# EAGLE board PROIECTUL TUL_FIN (EAGLE 9.7.0)
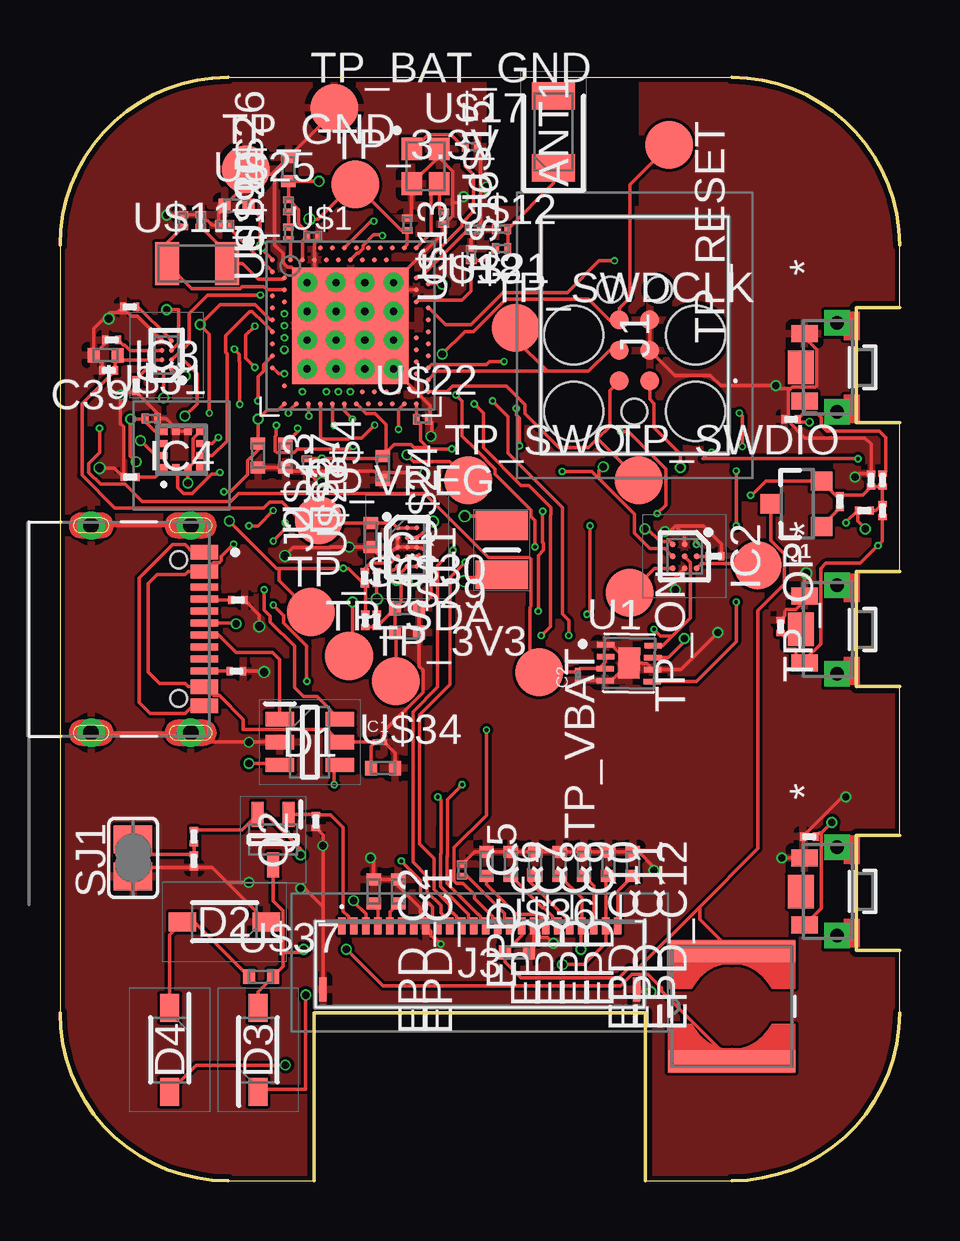
[diagram p0: board, top side]
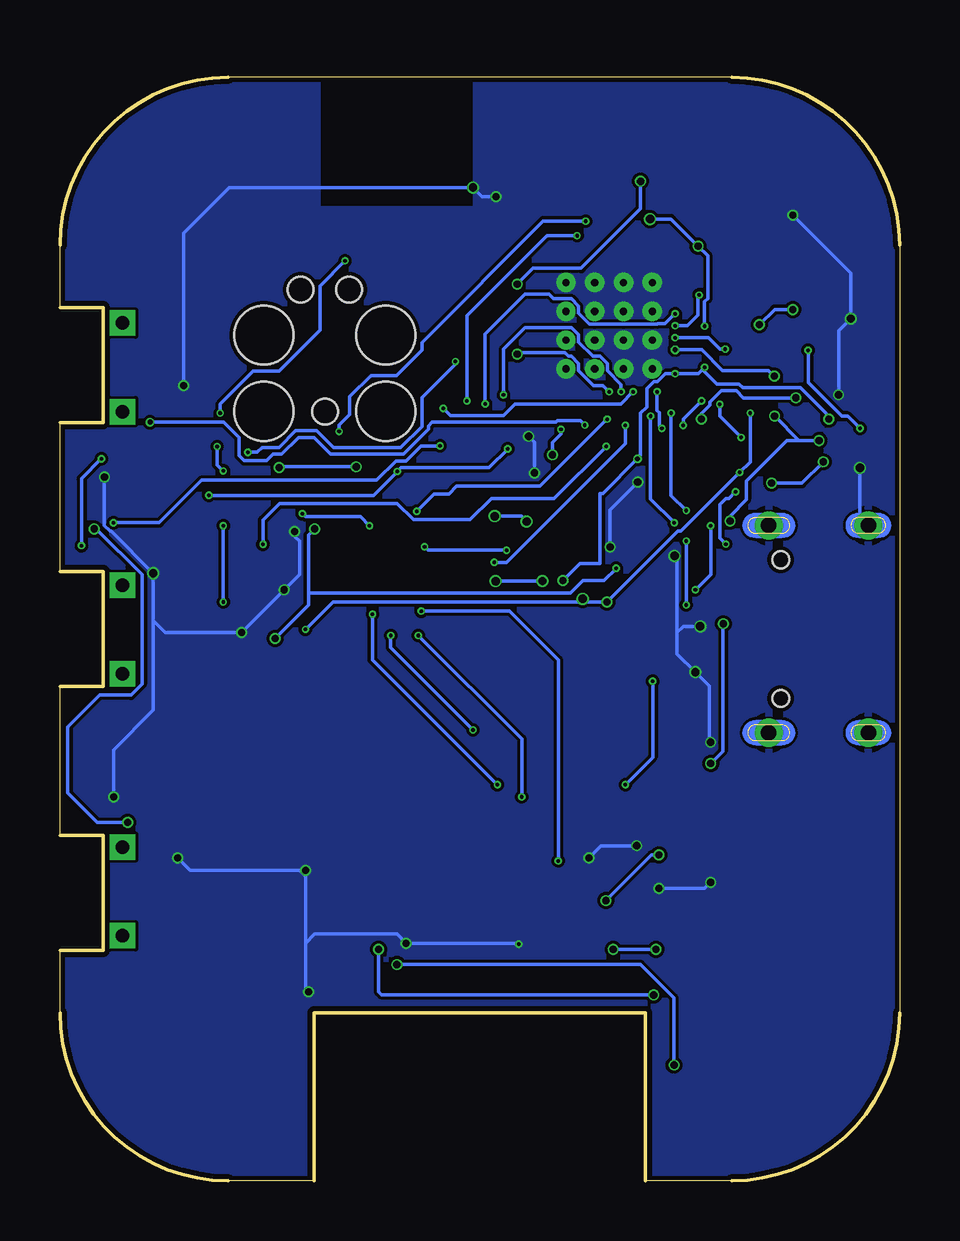
[diagram p1: board, bottom side, seen from below]

Size 35 x 46 mm. Coordinates in mm from the lower left corner, seen from the top.
Outline: 7,0 10.6,0 10.6,7 24.4,7 24.4,0 28,0 arc90 35,7 35,9.6 33.2,9.6 33.2,14.4 35,14.4 35,20.6 33.2,20.6 33.2,25.4 35,25.4 35,31.6 33.2,31.6 33.2,36.4 35,36.4 35,39 arc90 28,46 7,46 arc90 0,39 0,7 arc90 7,0
Copper layers ([2:(1+2*15)+16:15]): Top 0.035mm / dielectric 1.6mm / Route2 0.035mm / dielectric 0.15mm / Route15 0.035mm / dielectric 0.2mm / Bottom 0.035mm
Design rules "jlcpcb-2layers.dru *": minimum track width 0.15mm, minimum drill 0.15mm, track to track 5mil, track to pad 0.05mm, pad to pad 5mil, via to via 5mil, smd to smd 5mil, copper to edge 0.2mm, drill to drill 0.1mm, minimum pad ring 10mil, minimum via ring 3mil, stop-mask expansion 4mil, vias tented up to drill 0mil, thermal gap 10mil

## Footprints (pad centres in the part's own frame; a part is rotated, then mirrored left to right if it is on the bottom)
2450AT18B100E_ANTC3216X140N = smd 1.15 x 1.8: 1 -1.5,0; 2 1.5,0
GRM011R60J152KE01L_2_CAPC0201X13N = smd 0.22 x 0.23: 1 -0.185,0; 2 0.185,0
GRM011R60J152KE01L_1_0201 = smd 0.35 x 0.25: 1 0,0.275; 2 0,-0.275
NORDIC_NRF_3_RESC0402_L = smd 0.5 x 0.6: 1 -0.5,0; 2 0.5,0
ESP32_C6_LIBRARY_3_SOT95P280X145-6N = smd 1.2 x 0.6: 1 -1.25,0.95; 2 -1.25,0; 3 -1.25,-0.95; 4 1.25,-0.95; 5 1.25,0; 6 1.25,0.95
ESP32_C6_LIBRARY_5_SOD3716X135N = smd 1.15 x 0.8: 1 -1.75,0; 2 1.75,0
NORDIC_NRF_3_RESC0201_L = smd 0.28 x 0.43: 1 -0.255,0; 2 0.255,0
RT6160AWSC_BGA15C40P3X5_140X230X60 = smd 0.216 x 0.216: A1 -0.4,0.8; A2 0,0.8; A3 0.4,0.8; B1 -0.4,0.4; B2 0,0.4; B3 0.4,0.4; C1 -0.4,0; C2 0,0; C3 0.4,0; D1 -0.4,-0.4; D2 0,-0.4; D3 0.4,-0.4; E1 -0.4,-0.8; E2 0,-0.8; E3 0.4,-0.8
DRV2605YZFR_BGA9C50P3X3_144X144X62 = smd 0.25 x 0.25: A1 -0.5,0.5; A2 0,0.5; A3 0.5,0.5; B1 -0.5,0; B2 0,0; B3 0.5,0; C1 -0.5,-0.5; C2 0,-0.5; C3 0.5,-0.5
BQ25180YBGR_BGA8C40P2X4_100X155X50 = smd 0.2 x 0.2: A1 -0.2,0.6; A2 0.2,0.6; B1 -0.2,0.2; B2 0.2,0.2; C1 -0.2,-0.2; C2 0.2,-0.2; D1 -0.2,-0.6; D2 0.2,-0.6
BMA423_BMA423 = smd 0.3 x 0.35: 1 -0.75,-0.775; 2 -0.25,-0.775; 3 0.25,-0.775; 4 0.75,-0.775; 7 0.75,0.775; 8 0.25,0.775; 9 -0.25,0.775; 10 -0.75,0.775 | smd 0.35 x 0.3: 5 0.775,-0.25; 6 0.775,0.25; 11 -0.775,0.25; 12 -0.775,-0.25
TC2030-IDC_TC2030IDC = smd 0.783 x 0.783: 1 -0.953,-0.635; 2 -0.953,0.635; 3 0.317,-0.635; 4 0.317,0.635; 5 1.588,-0.635; 6 1.588,0.635 | hole 2.451: -2.223,-2.54; -2.223,2.54; 0.952,-2.54; 0.952,2.54 | hole 1.067: -2.223,0; 2.857,-1.016; 2.857,1.016
KH-TYPE-C-16P_KINGHELM_KH-TYPE-C-16P = smd 0.6 x 1.15: A1_B12 -3.2,4.725; A4_B9 -2.4,4.725; A9_B4 2.4,4.725; A12_B1 3.2,4.725 | smd 0.3 x 1.15: A5 -1.25,4.725; A6 -0.25,4.725; A7 0.25,4.725; A8 1.25,4.725; B5 1.75,4.725; B6 0.75,4.725; B7 -0.75,4.725; B8 -1.75,4.725 | drill 0.65 pad 1.05: SH1 -4.32,0; SH2 4.32,0; SH3 -4.32,4.15; SH4 4.32,4.15 | hole 0.7: -2.89,3.65; 2.89,3.65
503480-2400_5034802400 = smd 0.3 x 0.7: 1 -5.75,1.525; 2 -5.25,1.525; 3 -4.75,1.525; 4 -4.25,1.525; 5 -3.75,1.525; 6 -3.25,1.525; 7 -2.75,1.525; 8 -2.25,1.525; 9 -1.75,1.525; 10 -1.25,1.525; 11 -0.75,1.525; 12 -0.25,1.525; 13 0.25,1.525; 14 0.75,1.525; 15 1.25,1.525; 16 1.75,1.525; 17 2.25,1.525; 18 2.75,1.525; 19 3.25,1.525; 20 3.75,1.525; 21 4.25,1.525; 22 4.75,1.525; 23 5.25,1.525; 24 5.75,1.525 | smd 0.3 x 1: MP1 -6.54,-1.125; MP2 6.54,-1.125
MLP2016SR47MT0S1_INDC2016X100N = smd 1.2 x 2.2: 1 -1.028,0; 2 1.028,0
ESP32_C6_LIBRARY_2_IND_4828-WE-TPC_WRE = smd 0.9 x 5.3: 1 -2.286,0; 2 2.286,0
ESP32_C6_LIBRARY_4_ESP32_C6_LIBRARY_4_ESP32_C6_LIBRARY_4_ESP32_C6_LIBRARY_4_ESP32_WROVER_SPARKFUN-DISCRETESEMI_SOT23-3 = smd 0.8 x 0.9: 1 -0.95,-1; 2 0.95,-1; 3 0,1.1
ESP32_C6_LIBRARY_6_SOT65P210X110-3N = smd 1.05 x 0.5: 1 -1.05,0.65; 2 -1.05,-0.65; 3 1.05,0
ERA-1AEB3401C_0201 = smd 0.35 x 0.25: 1 0,0.275; 2 0,-0.275
CPF0201D7K68C1_0201 = smd 0.35 x 0.25: 1 0,0.275; 2 0,-0.275
ESP32_C6_LIBRARY_7_JUMPER_SJ = smd 1.168 x 1.6: 1 -0.762,0; 2 0.762,0
2025-10-22_07-23-44_LIBRARY_SW_EVP-AKE31A_PAN = smd 0.711 x 1.092: 1 -1.4,-0.972; 2 1.4,-0.972 | drill 0.559 pad 0.914 square: 3 -1.848,0.381; 4 1.848,0.381 | smd 1.397 x 1.092: 5 0,-1.124
HECTOR_WATCH_1_TP20R = smd 2 x 2: TP 0,0
ESP32_C6_LIBRARY_SON50P200X200X80-9N = smd 0.76 x 0.27: 1 -0.985,0.75; 2 -0.985,0.25; 3 -0.985,-0.25; 4 -0.985,-0.75; 5 0.985,-0.75; 6 0.985,-0.25; 7 0.985,0.25; 8 0.985,0.75 | smd 0.9 x 1.3: 9 0,0
NORDIC_NRF_4_AQFN50P700X700X85_HS-74N = smd 4.85 x 4.85: P$74 0,0 | drill 0.3 pad 0.6: P$75 -1.8,1.8; P$76 -0.6,1.8; P$77 0.6,1.8; P$78 1.8,1.8; P$79 -1.8,0.6; P$80 -0.6,0.6; P$81 0.6,0.6; P$82 1.8,0.6; P$83 -1.8,-0.6; P$84 -0.6,-0.6; P$85 0.6,-0.6; P$86 1.8,-0.6; P$87 -1.8,-1.8; P$88 -0.6,-1.8; P$89 0.6,-1.8; P$90 1.8,-1.8 | smd 0.2 x 0.2: P$A8 -1.25,3.25; P$A10 -0.75,3.25; P$A12 -0.25,3.25; P$A14 0.25,3.25; P$A16 0.75,3.25; P$A18 1.25,3.25; P$A20 1.75,3.25; P$A22 2.25,3.25; P$A23 2.75,3.25; P$AA24 3.25,-2.25; P$AB2 -2.75,-2.5; P$AC5 -2,-2.75; P$AC9 -1,-2.75; P$AC11 -0.5,-2.75; P$AC13 0,-2.75; P$AC15 0.5,-2.75; P$AC17 1,-2.75; P$AC19 1.5,-2.75; P$AC21 2,-2.75; P$AC24 3.25,-2.75; P$AD2 -2.75,-3.25; P$AD4 -2.25,-3.25; P$AD6 -1.75,-3.25; P$AD8 -1.25,-3.25; P$AD10 -0.75,-3.25; P$AD12 -0.25,-3.25; P$AD14 0.25,-3.25; P$AD16 0.75,-3.25; P$AD18 1.25,-3.25; P$AD20 1.75,-3.25; P$AD22 2.25,-3.25; P$AD23 2.75,-3.25; P$B1 -3.25,2.75; P$B3 -2.5,2.75; P$B5 -2,2.75; P$B7 -1.5,2.75; P$B9 -1,2.75; P$B11 -0.5,2.75; P$B13 0,2.75; P$B15 0.5,2.75; P$B17 1,2.75; P$B19 1.5,2.75; P$B24 3.25,2.75; P$C1 -3.25,2.25; P$D2 -2.75,2; P$D23 2.75,2; P$E24 3.25,1.75; P$F2 -2.75,1.5; P$F23 2.75,1.5; P$G1 -3.25,1.25; P$H2 -2.75,1; P$H23 2.75,1; P$J1 -3.25,0.75; P$J24 3.25,0.75; P$K2 -2.75,0.5; P$L1 -3.25,0.25; P$L24 3.25,0.25; P$M2 -2.75,0; P$N1 -3.25,-0.25; P$N24 3.25,-0.25; P$P2 -2.75,-0.5; P$P23 2.75,-0.5; P$R1 -3.25,-0.75; P$R24 3.25,-0.75; P$T2 -2.75,-1; P$T23 2.75,-1; P$U1 -3.25,-1.25; P$U24 3.25,-1.25; P$V23 2.75,-1.5; P$W1 -3.25,-1.75; P$W24 3.25,-1.75; P$Y2 -2.75,-2; P$Y23 2.75,-2
RESC0201_L = smd 0.28 x 0.43: 1 -0.255,0; 2 0.255,0
NORDIC_NRF_1_XTAL_3215_N = smd 1 x 1.8: 1 -1.25,0; 2 1.25,0
NORDIC_NRF_2_RESC0201_L = smd 0.28 x 0.43: 1 -0.255,0; 2 0.255,0
NORDIC_NRF_BT-XTAL_2016_N = smd 0.95 x 0.85: 1 -0.725,-0.575; 2 0.725,-0.575; 3 0.725,0.575; 4 -0.725,0.575

## Placement (x,y rotation side)
ANT1  2450AT18B100E_2450AT18B100E  [2450AT18B100E_ANTC3216X140N]  20.57,43.73 90 top
C1  0.1uF  [GRM011R60J152KE01L_2_CAPC0201X13N]  13.34,18.29 0 top
C2  0.1uF  [GRM011R60J152KE01L_2_CAPC0201X13N]  21.59,21.08 90 top
C4  1uF  [GRM011R60J152KE01L_1_0201]  3.17,33.15 180 top
C5  1uF  [GRM011R60J152KE01L_1_0201]  2.16,35.05 90 top
C6  0.1uF  [GRM011R60J152KE01L_1_0201]  2.03,33.78 90 top
C7  1uF  [GRM011R60J152KE01L_1_0201]  27.3,26.04 270 top
C8  0.1uF  [GRM011R60J152KE01L_1_0201]  33.81,29.21 0 top
C9  1uF  [GRM011R60J152KE01L_1_0201]  30.04,23.11 0 top
C10  1uF  [GRM011R60J152KE01L_1_0201]  31.24,14.35 90 top
C11  1uF  [GRM011R60J152KE01L_1_0201]  30.48,31.75 90 top
C39  10uF  [NORDIC_NRF_3_RESC0402_L]  1.91,34.42 180 top
D1  ESP32_C6_LIBRARY_3_USBLC6-2SC6Y  [ESP32_C6_LIBRARY_3_SOT95P280X145-6N]  10.41,18.29 0 top
D2  MBR0530  [ESP32_C6_LIBRARY_5_SOD3716X135N]  6.86,10.79 180 top
D3  MBR0530  [ESP32_C6_LIBRARY_5_SOD3716X135N]  8.26,5.46 90 top
D4  MBR0530  [ESP32_C6_LIBRARY_5_SOD3716X135N]  4.57,5.46 270 top
EPD_C1  1uF/50V  [NORDIC_NRF_3_RESC0402_L]  14.1,12.06 270 top
EPD_C2  1uF/50V  [NORDIC_NRF_3_RESC0402_L]  13.08,12.06 270 top
EPD_C5  0.1uF/50V  [NORDIC_NRF_3_RESC0201_L]  16.76,12.95 270 top
EPD_C6  1uF/50V  [NORDIC_NRF_3_RESC0402_L]  17.78,13.21 270 top
EPD_C7  1uF/50V  [NORDIC_NRF_3_RESC0402_L]  18.8,13.21 270 top
EPD_C8  1uF/50V  [NORDIC_NRF_3_RESC0402_L]  19.81,13.21 270 top
EPD_C9  1uF/50V  [NORDIC_NRF_3_RESC0402_L]  20.83,13.21 270 top
EPD_C10  1uF/50V  [NORDIC_NRF_3_RESC0402_L]  21.84,13.21 270 top
EPD_C11  1uF/50V  [NORDIC_NRF_3_RESC0402_L]  22.86,13.21 270 top
EPD_C12  1uF/50V  [NORDIC_NRF_3_RESC0402_L]  23.88,13.21 270 top
IC1  RT6160AWSC  [RT6160AWSC_BGA15C40P3X5_140X230X60]  14.48,26.42 0 top
IC2  DRV2605YZFR_DRV2605YZFR  [DRV2605YZFR_BGA9C50P3X3_144X144X62]  26.04,26.04 270 top
IC3  BQ25180YBGR_BQ25180YBGR  [BQ25180YBGR_BGA8C40P2X4_100X155X50]  4.45,34.42 180 top
IC4  BMA423_BMA423  [BMA423_BMA423]  5.08,30.48 0 top
J1  TC2030-IDC_TC2030-IDC  [TC2030-IDC_TC2030IDC]  23.96,34.3 90 top
J2  KH-TYPE-C-16P_KH-TYPE-C-16P  [KH-TYPE-C-16P_KINGHELM_KH-TYPE-C-16P]  1.3,23 270 top
J3  503480-2400_503480-2400  [503480-2400_5034802400]  17.5,9.1 0 top
L1  MLP2016SR47MT0S1_FTC252012SR47MBCA  [MLP2016SR47MT0S1_INDC2016X100N]  18.41,26.29 270 top
L2  68uH  [ESP32_C6_LIBRARY_2_IND_4828-WE-TPC_WRE]  28,7.27 90 top
Q1  20V/4.2A/52mΩ/1.4W  [ESP32_C6_LIBRARY_4_ESP32_C6_LIBRARY_4_ESP32_C6_LIBRARY_4_ESP32_C6_LIBRARY_4_ESP32_WROVER_SPARKFUN-DISCRETESEMI_SOT23-3]  30.74,28.22 90 top
Q2  SI1308EDL-T1-GE3  [ESP32_C6_LIBRARY_6_SOT65P210X110-3N]  8.89,14.22 270 top
R1  10k  [ERA-1AEB3401C_0201]  34.29,29.21 0 top
R2  10k  [CPF0201D7K68C1_0201]  33.53,27.94 90 top
R3  10k  [ERA-1AEB3401C_0201]  34.29,27.94 180 top
R4  10k  [ERA-1AEB3401C_0201]  2.9,36.43 90 top
R5  0  [CPF0201D7K68C1_0201]  12.7,25.14 0 top
R6  0  [ERA-1AEB3401C_0201]  13.21,25.15 0 top
R7  3k3  [ERA-1AEB3401C_0201]  13.21,23.37 180 top
R8  3k3  [ERA-1AEB3401C_0201]  12.73,23.37 180 top
R9  0  [ERA-1AEB3401C_0201]  2.92,29.34 270 top
R10  0.47  [ERA-1AEB3401C_0201]  5.59,14.35 180 top
R11  2.2  [ERA-1AEB3401C_0201]  5.59,13.34 180 top
R12  10k  [ERA-1AEB3401C_0201]  10.67,14.99 180 top
R13  5k1  [ERA-1AEB3401C_0201]  7.36,21.25 90 top
R14  5k1  [ERA-1AEB3401C_0201]  7.42,24.21 270 top
R_PWR_EPD  10k  [ERA-1AEB3401C_0201]  32.51,28.32 180 top
SJ1  [ESP32_C6_LIBRARY_7_JUMPER_SJ]  3.05,13.46 90 top
SW4  2025-10-22_07-23-44_LIBRARY_EVP-AKE31A  [2025-10-22_07-23-44_LIBRARY_SW_EVP-AKE31A_PAN]  32.01,33.91 270 top
SW5  2025-10-22_07-23-44_LIBRARY_EVP-AKE31A  [2025-10-22_07-23-44_LIBRARY_SW_EVP-AKE31A_PAN]  32.01,12.06 270 top
SW6  2025-10-22_07-23-44_LIBRARY_EVP-AKE31A  [2025-10-22_07-23-44_LIBRARY_SW_EVP-AKE31A_PAN]  32.01,22.99 270 top
TP_3.3V  HECTOR_WATCH_1_TPTP20R  [HECTOR_WATCH_1_TP20R]  12.32,41.53 0 top
TP_3V3  HECTOR_WATCH_1_TPTP20R  [HECTOR_WATCH_1_TP20R]  14.01,20.83 0 top
TP_BAT_GND  HECTOR_WATCH_1_TPTP20R  [HECTOR_WATCH_1_TP20R]  11.43,44.72 0 top
TP_GND  HECTOR_WATCH_1_TPTP20R  [HECTOR_WATCH_1_TP20R]  7.75,42.16 0 top
TP_ON  HECTOR_WATCH_1_TPTP20R  [HECTOR_WATCH_1_TP20R]  23.75,24.51 270 top
TP_OP  HECTOR_WATCH_1_TPTP20R  [HECTOR_WATCH_1_TP20R]  29.08,25.65 270 top
TP_RESET  HECTOR_WATCH_1_TPTP20R  [HECTOR_WATCH_1_TP20R]  25.4,43.18 270 top
TP_SCL  HECTOR_WATCH_1_TPTP20R  [HECTOR_WATCH_1_TP20R]  10.46,23.71 0 top
TP_SDA  HECTOR_WATCH_1_TPTP20R  [HECTOR_WATCH_1_TP20R]  12.05,21.88 0 top
TP_SWDCLK  HECTOR_WATCH_1_TPTP20R  [HECTOR_WATCH_1_TP20R]  18.99,35.56 0 top
TP_SWDIO  HECTOR_WATCH_1_TPTP20R  [HECTOR_WATCH_1_TP20R]  24.13,29.21 0 top
TP_SWO  HECTOR_WATCH_1_TPTP20R  [HECTOR_WATCH_1_TP20R]  17.02,29.21 0 top
TP_VBAT  HECTOR_WATCH_1_TPTP20R  [HECTOR_WATCH_1_TP20R]  19.98,21.21 270 top
TP_VREG  HECTOR_WATCH_1_TPTP20R  [HECTOR_WATCH_1_TP20R]  10.79,27.53 0 top
U1  ESP32_C6_LIBRARY_MAX17048G+T10  [ESP32_C6_LIBRARY_SON50P200X200X80-9N]  23.72,21.59 358.8 top
U$1  NORDIC_NRF_4_NRF52840_QF  [NORDIC_NRF_4_AQFN50P700X700X85_HS-74N]  12.11,35.65 0 top
U$2  100nF  [RESC0201_L]  6.87,39.84 0 top
U$4  100nF  [NORDIC_NRF_3_RESC0201_L]  10.29,29.84 270 top
U$5  12pF  [RESC0201_L]  5.12,40.02 270 top
U$6  12pF  [RESC0201_L]  5.88,40.02 270 top
U$8  47nF  [RESC0201_L]  10.54,39.37 180 top
U$10  100nF  [RESC0201_L]  14.48,39.88 270 top
U$11  [NORDIC_NRF_1_XTAL_3215_N]  5.71,38.23 0 top
U$12  [NORDIC_NRF_2_RESC0201_L]  18.41,38.86 0 top
U$13  1pF  [NORDIC_NRF_3_RESC0201_L]  17.14,38.61 90 top
U$15  32MHz  [NORDIC_NRF_BT-XTAL_2016_N]  15.24,42.29 270 top
U$16  12pF  [NORDIC_NRF_3_RESC0201_L]  16,40.13 270 top
U$17  12pF  [NORDIC_NRF_3_RESC0201_L]  17.14,43.11 0 top
U$18  100pF  [NORDIC_NRF_3_RESC0201_L]  17.27,39.66 180 top
U$19  10μH  [NORDIC_NRF_2_RESC0201_L]  9.53,39.5 90 top
U$20  15nH  [NORDIC_NRF_2_RESC0201_L]  9.53,40.64 90 top
U$21  1pF  [NORDIC_NRF_3_RESC0201_L]  18.41,39.67 180 top
U$22  100nF  [NORDIC_NRF_3_RESC0201_L]  15.11,31.75 0 top
U$23  4.7μF  [NORDIC_NRF_3_RESC0402_L]  8.26,30.23 270 top
U$24  4.7μF  [NORDIC_NRF_3_RESC0402_L]  13.46,29.72 270 top
U$25  4.7μF  [NORDIC_NRF_3_RESC0402_L]  7.37,40.64 0 top
U$26  1μF  [NORDIC_NRF_3_RESC0402_L]  9.53,42.16 90 top
U$27  4.7μF  [NORDIC_NRF_3_RESC0402_L]  9.4,30.23 270 top
U$28  10uF  [NORDIC_NRF_3_RESC0402_L]  12.95,26.92 90 top
U$29  22uF  [NORDIC_NRF_3_RESC0402_L]  14.48,22.86 0 top
U$30  22uF  [NORDIC_NRF_3_RESC0402_L]  14.48,23.88 0 top
U$31  100nF  [NORDIC_NRF_3_RESC0201_L]  3.81,31.77 0 top
U$34  4.7uF  [NORDIC_NRF_3_RESC0402_L]  13.46,17.2 0 top
U$36  10uF  [NORDIC_NRF_3_RESC0402_L]  19.05,9.53 0 top
U$37  4.7uF/25V  [NORDIC_NRF_3_RESC0402_L]  8.38,8.51 0 top

## Library data of the parts
ANT1 = InkTime_v5; ARROW_PART_NUMBER: 2450AT18B100E; ARROW_PRICE-STOCK: https://www.arrow.com/en/products/2450at18b100e/johanson-dielectrics?utm_currency=USD&region=nac; DESCRIPTION: Antennas 2.45GHz ANTENNA; HEIGHT: 1.4mm; MANUFACTURER_NAME: JOHANSON TECHNOLOGY; MANUFACTURER_PART_NUMBER: 2450AT18B100E; MOUSER_PART_NUMBER: 609-2450AT18B100E; MOUSER_PRICE-STOCK: https://www.mouser.co.uk/ProductDetail/Johanson-Technology/2450AT18B100E?qs=yCnrNFeXz%252Bh5MFsFIXGZGA%3D%3D
C1 C2 = InkTime_v5; AVAILABILITY: In Stock; CHECK_PRICES: https://www.snapeda.com/parts/GRM011R60J152KE01L/Murata/view-part/?ref=eda; DESCRIPTION: SMD Capacitor X5R(EIA) with Capacitance: 1500pF Tol. 10%. Rated Voltage: 6.3Vdc; MF: Murata; MP: GRM011R60J152KE01L; PACKAGE: 0201 Murata; PRICE: None; SNAPEDA_LINK: https://www.snapeda.com/parts/GRM011R60J152KE01L/Murata/view-part/?ref=snap
C4-C11 C39 EPD_C1 EPD_C2 EPD_C5-EPD_C12 R1-R14 R_PWR_EPD SJ1 SW4-SW6 TP_3.3V TP_3V3 TP_BAT_GND TP_GND TP_ON TP_OP TP_RESET TP_SCL TP_SDA TP_SWDCLK TP_SWDIO TP_SWO TP_VBAT TP_VREG U$1 U$4 U$11-U$13 U$15-U$31 U$34 U$36 U$37 = InkTime_v5
D1 = InkTime_v5; AVAILABILITY: In Stock; CHECK_PRICES: https://www.snapeda.com/parts/USBLC6-2SC6Y/STMicroelectronics/view-part/?ref=eda; DESCRIPTION: 17V Clamp 5A (8/20µs) Ipp Tvs Diode Surface Mount SOT-23-6; MF: STMicroelectronics; MP: USBLC6-2SC6Y; PACKAGE: SOT-23-6 STMicroelectronics; PRICE: None; SNAPEDA_LINK: https://www.snapeda.com/parts/USBLC6-2SC6Y/STMicroelectronics/view-part/?ref=snap
D2-D4 = InkTime_v5; AVAILABILITY: In Stock; CHECK_PRICES: https://www.snapeda.com/parts/MBR0530/Onsemi/view-part/?ref=eda; DESCRIPTION: Diode Schottky 30 V 500mA Surface Mount SOD-123; MF: ON Semiconductor; MP: MBR0530; PACKAGE: SOD-123-2 ON Semiconductor; PRICE: None; PURCHASE-URL: https://www.snapeda.com/api/url_track_click_mouser/?unipart_id=179458&manufacturer=ON Semiconductor&part_name=MBR0530&search_term=None; SNAPEDA_LINK: https://www.snapeda.com/parts/MBR0530/Onsemi/view-part/?ref=snap
IC1 = InkTime_v5; DESCRIPTION: Buck-Boost Regulator Positive Output Step-Up/Step-Down I2C DC-DC Controller IC 15-WL-CSP (BSC) (1.4x2.3); HEIGHT: 0.6mm; MANUFACTURER_NAME: RICHTEK; MANUFACTURER_PART_NUMBER: RT6160AWSC; MOUSER_PART_NUMBER: 835-RT6160AWSC; MOUSER_PRICE-STOCK: https://www.mouser.co.uk/ProductDetail/Richtek/RT6160AWSC?qs=amGC7iS6iy%2FLd9PSoixZXQ%3D%3D
IC2 = InkTime_v5; ARROW_PART_NUMBER: DRV2605YZFR; ARROW_PRICE-STOCK: https://www.arrow.com/en/products/drv2605yzfr/texas-instruments?region=nac; DESCRIPTION: Haptic Driver for ERM/LRA with Built-In Library and Smart Loop Architecture; HEIGHT: 0.625mm; MANUFACTURER_NAME: Texas Instruments; MANUFACTURER_PART_NUMBER: DRV2605YZFR
IC3 = InkTime_v5; ARROW_PART_NUMBER: BQ25180YBGR; ARROW_PRICE-STOCK: https://www.arrow.com/en/products/bq25180ybgr/texas-instruments?utm_currency=USD&region=nac; DESCRIPTION: Charger IC Lithium Ion/Polymer, Lithium Iron Phosphate 8-DSBGA (1.6x1.1); HEIGHT: 0.5mm; MANUFACTURER_NAME: Texas Instruments; MANUFACTURER_PART_NUMBER: BQ25180YBGR; MOUSER_PART_NUMBER: 595-BQ25180YBGR; MOUSER_PRICE-STOCK: https://www.mouser.co.uk/ProductDetail/Texas-Instruments/BQ25180YBGR?qs=doiCPypUmgEWjAK%252BJAX6Tw%3D%3D
IC4 = InkTime_v5; ARROW_PART_NUMBER: BMA423; ARROW_PRICE-STOCK: https://www.arrow.com/en/products/bma423/bosch; DESCRIPTION: Accelerometers Triaxial low-g 12bit Acceleration Sensor; HEIGHT: 1mm; MANUFACTURER_NAME: BOSCH; MANUFACTURER_PART_NUMBER: BMA423; MOUSER_PART_NUMBER: 262-BMA423; MOUSER_PRICE-STOCK: https://www.mouser.co.uk/ProductDetail/Bosch-Sensortec/BMA423?qs=HXFqYaX1Q2xC%252BSgeGoX3mg%3D%3D
J1 = InkTime_v5; DESCRIPTION: CABLE ADAPTER 6 POS; HEIGHT: 19mm; MANUFACTURER_NAME: Tag Connect; MANUFACTURER_PART_NUMBER: TC2030-IDC
J2 = InkTime_v5; AVAILABILITY: Not in stock; CHECK_PRICES: https://www.snapeda.com/parts/KH-TYPE-C-16P/Kinghelm/view-part/?ref=eda; MF: kinghelm; MP: KH-TYPE-C-16P; PACKAGE: None; PRICE: None; SNAPEDA_LINK: https://www.snapeda.com/parts/KH-TYPE-C-16P/Kinghelm/view-part/?ref=snap
J3 = InkTime_v5; DESCRIPTION: FFC & FPC Connectors 0.5mm FPC RA SMT Dual Contact 24Ckt; HEIGHT: 1.87mm; MANUFACTURER_NAME: Molex; MANUFACTURER_PART_NUMBER: 503480-2400; MOUSER_PART_NUMBER: 538-503480-2400; MOUSER_PRICE-STOCK: https://www.mouser.co.uk/ProductDetail/Molex/503480-2400?qs=OAhjpuo3Vu7efIoxFh9AOw%3D%3D
L1 = InkTime_v5; DESCRIPTION: SMD / SMT Inductors (Coils), L=0.47?H, L x W x T :; HEIGHT: 1mm; JLCPCB: https://jlcpcb.com/partdetail/6763488-FTC252012SR47MBCA/C5832368; MANUFACTURER_NAME: TDK; MANUFACTURER_PART_NUMBER: FTC252012SR47MBCA
L2 = InkTime_v5; COPYRIGHT: Copyright (C) 2024 Ultra Librarian. All rights reserved.; MANUFACTURER_PART_NUMBER: 744043680; MFR_NAME: Wurth Electronics
Q1 = InkTime_v5; PROD_ID: TRAN-14388
Q2 = InkTime_v5; AVAILABILITY: In Stock; CHECK_PRICES: https://www.snapeda.com/parts/SI1308EDL-T1-GE3/Vishay+Siliconix/view-part/?ref=eda; DESCRIPTION: Si1308EDL-T1-GE3 N-channel MOSFET Transistor, 1.5 A, 30 V, 3-Pin SC-70 | Siliconix / Vishay SI1308EDL-T1-GE3; MF: Vishay Siliconix; MP: SI1308EDL-T1-GE3; PACKAGE: SOT-323 Vishay Semiconductor; PRICE: None; PURCHASE-URL: https://www.snapeda.com/api/url_track_click_mouser/?unipart_id=274603&manufacturer=Vishay Siliconix&part_name=SI1308EDL-T1-GE3&search_term=None; SNAPEDA_LINK: https://www.snapeda.com/parts/SI1308EDL-T1-GE3/Vishay+Siliconix/view-part/?ref=snap
U1 = InkTime_v5; AVAILABILITY: In Stock; CHECK_PRICES: https://www.snapeda.com/parts/MAX17048G+T10/Analog+Devices/view-part/?ref=eda; DESCRIPTION: 3µA 1-Cell/2-Cell Fuel Gauge with ModelGauge; MF: Analog Devices; MP: MAX17048G+T10; PACKAGE: TDFN-8 Maxim; PRICE: None; PURCHASE-URL: https://www.snapeda.com/api/url_track_click_mouser/?unipart_id=329239&manufacturer=Analog Devices&part_name=MAX17048G+T10&search_term=None; SNAPEDA_LINK: https://www.snapeda.com/parts/MAX17048G+T10/Analog+Devices/view-part/?ref=snap
U$2 U$5 U$6 U$8 U$10 = Nordic_nRF

## Nets
3V3: C8.2 IC1.E2 IC1.E3 IC2.C2 IC4.3 IC4.7 IC4.10 J1.1 Q1.2 R1.2 R2.2 R3.2 R7.1 R8.1 R_PWR_EPD.2 TP_3.3V.TP TP_3V3.TP U$1.P$A22 U$1.P$AD14 U$1.P$AD23 U$1.P$B1 U$1.P$W1 U$1.P$Y2 U$4.1 U$10.2 U$22.1 U$24.1 U$25.2 U$29.1 U$30.1 U$31.1
ALERT: U1.5 U$1.P$J24
D+: D1.4 U$1.P$AD6
D-: D1.6 U$1.P$AD4
DN: D1.1 J2.A7
DP: D1.3 J2.A6
EPD_3V3: EPD_C5.2 J3.15 J3.16 L2.2 Q1.3 U$36.1
EPD_BUSY: J3.9 U$1.P$AD12
EPD_CS: J3.12 U$1.P$K2
EPD_DC: J3.11 U$1.P$AD10
EPD_RST: J3.10 U$1.P$AC11
GDR: J3.2 Q2.1 R12.2
GND: C1.2 C2.1 C4.1 C5.1 C6.1 C7.1 C8.1 C9.1 C10.1 C11.1 C39.2 D1.2 D2.1 EPD_C1.1 EPD_C2.1 EPD_C5.1 EPD_C6.1 EPD_C7.1 EPD_C8.1 EPD_C9.1 EPD_C10.1 EPD_C11.1 EPD_C12.1 IC1.B1 IC1.C1 IC1.C2 IC1.C3 IC2.B1 IC2.B3 IC3.D2 IC4.8 IC4.9 J1.3 J1.5 J2.SH1 J2.SH2 J2.SH3 J2.SH4 J3.8 J3.17 J3.MP1 J3.MP2 R4.1 R9.2 R11.1 R12.1 R13.2 R14.1 SJ1.1 SW4.1 SW5.1 SW6.1 TP_BAT_GND.TP TP_GND.TP U1.1 U1.4 U1.6 U1.9 U$1.P$74 U$1.P$75 U$1.P$76 U$1.P$77 U$1.P$78 U$1.P$79 U$1.P$80 U$1.P$81 U$1.P$82 U$1.P$83 U$1.P$84 U$1.P$85 U$1.P$86 U$1.P$87 U$1.P$88 U$1.P$89 U$1.P$90 U$1.P$B7 U$1.P$F23 U$2.1 U$4.2 U$5.1 U$6.1 U$8.1 U$10.1 U$13.2 U$15.2 U$15.4 U$16.2 U$17.2 U$18.1 U$21.2 U$22.2 U$23.2 U$24.2 U$25.1 U$26.2 U$27.2 U$28.1 U$29.2 U$30.2 U$31.2 U$34.2 U$36.2
HAPTIC_EN: IC2.A1 U$1.P$U1
IMU_INT1: IC4.5 U$1.P$N1
IMU_INT2: IC4.6 U$1.P$P2
LX1: IC1.B2 IC1.B3 L1.1
LX2: IC1.D2 IC1.D3 L1.2
MOSI: J3.14 U$1.P$B13
N$1: U$1.P$D2 U$6.2 U$11.2
N$2: U$1.P$F2 U$5.2 U$11.1
N$3: U$1.P$H23 U$12.1 U$13.1
N$4: U$1.P$B3 U$19.1
N$5: U$1.P$B5 U$1.P$E24 U$8.2 U$20.2 U$26.1
N$6: IC1.E1 R6.1
N$7: U$1.P$D23 U$18.2
N$8: U$1.P$A23 U$15.3 U$16.1
N$9: U$1.P$B24 U$15.1 U$17.1
N$10: U$19.2 U$20.1
N$11: ANT1.1 U$12.2 U$21.1
N$12: U$1.P$AC5 U$27.1
N$13: J2.A1_B12 J2.A12_B1
N$14: IC1.D1 R5.1
N$15: IC4.1 R9.1
N$16: J2.B7
N$17: EPD_C2.2 J3.4
N$18: IC3.D1 R4.2
N$19: EPD_C1.2 J3.5
N$20: EPD_C7.2 J3.19
N$21: C7.2 IC2.A2
N$22: EPD_C6.2 J3.18
N$23: EPD_C8.2 J3.20
N$24: J2.B6
N$25: EPD_C12.2 J3.24
N$26: D2.2 D4.1 U$37.1
N$27: EPD_C10.2 J3.22
N$28: J2.A5 R14.2
N$29: J2.B5 R13.1
N$30: D3.2 L2.1 Q2.3 U$37.2
N$31: R10.1 R11.2 SJ1.2
NC: U$1.P$A18
NC2: U$1.P$N24
OUT+: IC2.A3 TP_OP.TP
OUT-: IC2.C3 TP_ON.TP
P0.04: U$1.P$J1
P0.09: U$1.P$L24
P0.13: C11.2 R1.1 SW4.2 U$1.P$AD8
P0.14: C10.2 R2.1 SW5.2 U$1.P$AC9
P0.19: U$1.P$AC15
P0.20: U$1.P$AD16
P0.21: U$1.P$AC17
P0.22: U$1.P$AD18
P0.23: U$1.P$AC19
P0.24: U$1.P$AD20
P0.25: U$1.P$AC21
P0.26: U$1.P$G1
P0.27: U$1.P$H2
P0.28: U$1.P$B11
P0.29: U$1.P$A10
P0.30: U$1.P$B9
P0.31: U$1.P$A8
P1.01: U$1.P$Y23
P1.01/1.6C: Q1.1 R_PWR_EPD.1
P1.02: C9.2 R3.1 SW6.2 U$1.P$W24
P1.03: U$1.P$V23
P1.04: U$1.P$U24
P1.05: U$1.P$T23
P1.06: U$1.P$R24
P1.07: U$1.P$P23
P1.09: U$1.P$R1
P1.10: U$1.P$A20
P1.11: U$1.P$B19
P1.12: U$1.P$B17
P1.13: U$1.P$A16
P1.14: U$1.P$B15
P1.15: U$1.P$A14
PMIC_INT: IC3.A1 U$1.P$T2
PREVGH: D3.1 EPD_C9.2 J3.21
PREVGL: D4.2 EPD_C11.2 J3.23
RESE: J3.3 Q2.2 R10.2
RESET: J1.6 TP_RESET.TP U$1.P$AC13
SASSS: U$1.P$C1 U$2.2
SCK: J3.13 U$1.P$A12
SCL: IC2.C1 IC3.B1 IC4.12 R5.2 R8.2 TP_SCL.TP U1.7 U$1.P$M2
SDA: IC2.B2 IC3.C1 IC4.2 R6.2 R7.2 TP_SDA.TP U1.8 U$1.P$L1
SWDCLK: J1.4 TP_SWDCLK.TP U$1.P$AA24
SWDIO: J1.2 TP_SWDIO.TP U$1.P$AC24
SWO: TP_SWO.TP U$1.P$AD22
VBAT: C2.2 C5.2 IC3.C2 TP_VBAT.TP U1.2 U1.3
VBUS: C1.1 C4.2 D1.5 IC3.A2 J2.A4_B9 J2.A9_B4 U$1.P$AD2 U$23.1 U$34.1
VREG: C6.2 C39.1 IC1.A1 IC1.A2 IC1.A3 IC3.B2 TP_VREG.TP U$28.2

## Tracks (layer width: path | path; a pad name or v marks a point on that pad's centre or on a via)
3V3  (via drill 0.15, 0.2, 0.3, 0.35)
  Top 0.15: 8.34,40.16 U$25.2 | U$1.P$AD23 U$22.1 15.03,31.57 15.03,30.86 15.33,30.57 | J1.1 24.59,32.58 24.77,32.41 24.77,31.39 25.86,30.3 v25.86,29.74 | v8.13,33.91 7.75,34.29 7.75,35.25 v8.13,35.63 | U$24.1 13.94,30.69 14.64,30.69 14.77,30.57 15.33,30.57 | v22.65,29.77 22.63,29.78 | 15.33,30.57 15.38,30.51 v16.33,30.51
  Top 0.152: IC1.E3 IC1.E2 14.22,25.36 14.22,24.83 | 14.22,24.83 14.22,24.12 U$30.1 | TP_3V3.TP 14.01,22.83 U$29.1 U$30.1 | U$1.P$B1 8.34,38.91 | 8.34,38.91 8.34,40.16 | U$1.P$A22 14.48,39.02 U$10.2 14.22,39.62 TP_3.3V.TP 12.19,41.53 10.75,40.09 v10.4,40.09 | IC4.10 3.94,31.25 3.56,31.64 U$31.1 3.53,31.75 v2.95,31.75 2.92,31.73 2.92,30.22 v3.17,29.97 | U$1.P$W1 9.11,33.65 U$1.P$Y2 | 8.34,38.91 v8.4,38.96 | U$30.1 13.98,23.86 R7.1 R8.1 | IC4.7 5.83,31.21 5.55,30.93 5.55,29.93 IC4.3 v5.33,29.09 v5.33,29.08 | R2.2 34.02,27.94 R3.2 R1.2 C8.2 33.47,28.6 R_PWR_EPD.2 32.32,28.6 Q1.2 29.42,29.17 28.83,28.57 v28.79,28.57 | IC2.C2 25.21,26.36 24.59,26.36 23.95,27 23.95,27.8 22.48,29.27 | U$4.1 10.31,30.12 10.34,30.1 v10.92,30.1 13.34,30.1 U$24.1 13.6,30.35 13.6,31.53 13.13,31.99 12.76,31.99 U$1.P$AD14 | v14.03,25.03 14.22,24.83 | 22.48,29.27 22.18,29.57 v20.93,29.57 | 22.48,29.27 22.48,29.63 22.63,29.78
  Bottom 0.15: 6.69,33.22 7.62,33.22 8.13,33.73 v8.13,33.91 | v8.13,35.63 8.13,36.65 8,36.78 8,38.56 v8.4,38.96 | v25.86,29.74 25.83,29.77 v22.65,29.77
  Bottom 0.152: 6.69,33.22 6.54,33.07 4.14,33.07 2.95,31.88 v2.95,31.75 | v5.33,29.08 4.06,29.08 v3.17,29.97 | v8.4,38.96 9.53,40.09 v10.4,40.09 | v8.13,33.91 8.39,33.65 U$1.P$Y2 9.76,33.65 10.09,33.32 10.24,33.32 10.54,33.02 10.54,32.26 10.79,32 10.79,30.23 v10.92,30.1 12.36,28.66 12.49,28.66 12.49,25.73 13.32,25.73 v14.03,25.03 | v28.79,28.57 21.93,28.57 v20.93,29.57 20.77,29.73 17.11,29.73 v16.33,30.51
  other vias: 9.36,33.65
ALERT  (via drill 0.15)
  Top 0.152: U$1.P$J24 16.07,35.69 17.13,35.69 18.47,37.03 21.16,37.03 22.48,38.35 v23.11,38.35 | v28.32,32 28.45,31.88 v28.45,30.61 | v28.19,29.59 v28.19,27.3 | v28.19,24.13 28.19,22.48 26.53,20.82 U1.5
  Bottom 0.152: v23.11,38.35 24.16,37.3 24.16,35.46 25.88,33.75 26.95,33.75 28.32,32.37 v28.32,32 | v28.45,30.61 28.45,29.84 v28.19,29.59 | v28.19,27.3 v28.19,24.13
D+  (via drill 0.15)
  Top 0.152: v9.39,27.43 9.39,27.17 v8.89,26.67 | v8.89,24 9.33,23.56 9.33,23.25 10.29,22.29 v10.29,20.83 | v11.43,16.51 11.43,17.1 D1.4 | U$1.P$AD6 10.37,32.38 v10.37,31.88
  Bottom 0.152: v8.89,24 v8.89,26.67 | v10.29,20.83 10.29,17.65 v11.43,16.51 | v10.37,31.88 10.39,31.86 10.39,28.43 v9.39,27.43
D-  (via drill 0.15)
  Top 0.15: U$1.P$AD4 9.6,32.14 9.6,32.08
  Top 0.152: D1.6 10.71,20.19 10.16,20.19 9.78,20.57 9.78,22.29 8.76,23.3 8.76,23.54 8.51,23.79 v8.51,24.64 | 9.6,32.08 v9.53,32 | v8.89,27.94 8.26,27.3 v7.87,27.3
  Bottom 0.152: v9.53,32 9.53,28.57 v8.89,27.94 | v7.87,27.3 7.87,25.27 v8.51,24.64
DN
  Top 0.15: J2.A7 6.61,22.75 7.33,22.03
  Top 0.152: 7.33,22.03 8.86,22.03 9.15,21.73 D1.1
DP  (via drill 0.3)
  Top 0.15: J2.A6 7.32,23.25 v7.35,23.22
  Top 0.152: D1.3 9.1,17.4 v7.87,17.4
  Bottom 0.152: v7.35,23.22 7.37,23.2 7.37,17.91 v7.87,17.4
EPD_3V3
  Top 0.15: Q1.3 29.64,26.69 30.21,26.12 30.21,24.89 29.1,23.78 29.1,13.86 26.67,11.43 | U$36.1 18.55,9.14 19.22,8.46 23.31,8.46 23.72,8.88 24.12,8.88 26.67,11.43 | 26.67,11.43 26.67,10.89 L2.2
  Top 0.152: EPD_C5.2 16.95,12.73 18.53,11.15 18.53,10.85 J3.15 J3.16 19.25,10.22 U$36.1
EPD_BUSY  (via drill 0.15)
  Top 0.15: U$1.P$AD12 11.86,32.09 v12.19,31.75 | v19.94,23.75 19.94,26.07 20.16,26.29 20.16,26.58 20.12,26.61 v20.12,27.91
  Top 0.152: J3.9 15.53,10.85 15.53,11.43 15.03,11.93 15.03,12.53 v14.22,13.34
  Bottom 0.15: v12.19,31.75 14.99,28.96 18.47,28.96 18.79,28.64 19.4,28.64 v20.12,27.91 | v19.94,23.75 16.26,23.75 14.22,21.72 v14.22,13.34
EPD_CS  (via drill 0.15)
  Top 0.15: v17.27,32.38 17.65,32 17.65,30.56 19.23,28.99 19.55,28.99 20.48,28.06 20.48,27.77 20.45,27.74 20.45,23.11 v20.07,22.73 | v15.75,16 15.88,15.88 15.88,14.73
  Top 0.152: 15.88,14.73 15.88,13.64 15.86,13.63 15.86,12.28 17.03,11.11 17.03,10.85 J3.12
  Bottom 0.15: U$1.P$K2 9.78,35.73 10.08,35.73 10.09,35.72 12.93,35.72 13.38,36.17 13.38,36.47 13.69,36.77 14.42,36.77 14.61,36.96 15.62,36.96 17.27,35.31 v17.27,32.38 | v20.07,22.73 15.75,18.41 v15.75,16
  other vias: 9.36,36.15
EPD_DC  (via drill 0.15)
  Top 0.152: J3.11 16.53,10.85 16.53,11.03 16.4,11.15 16.39,11.15 16.23,11.31 16.23,11.43 16.23,11.51 15.59,12.16 15.59,13.44 14.99,14.04 14.99,19.43 16.26,20.7 16.26,25.15 v16.89,25.78 | U$1.P$AD10 11.36,31.57 v11.43,31.5
  Bottom 0.152: v11.43,31.5 11.43,30.73 16.38,25.78 v16.89,25.78
EPD_RST  (via drill 0.15)
  Top 0.15: v16.51,32.77 16.76,32.51 16.76,31.05
  Top 0.152: J3.10 16.03,10.85 16.03,11.03 15.88,11.18 15.88,11.47 15.3,12.04 15.3,12.7 14.71,13.3 14.71,19.54 15.75,20.58 15.75,25.65 v16.38,26.29 | v19.8,26.43 19.8,27.53 19.64,27.69 19.64,27.97 18.14,29.47 18.14,29.68 17.36,30.46 16.76,31.05
  Bottom 0.15: U$1.P$AC11 11.61,33.2 12.18,33.77 12.18,34.07 12.49,34.38 12.78,34.38 13.38,34.97 13.38,35.27 13.69,35.58 14.12,35.58 14.14,35.56 15.62,35.56 16.51,34.67 v16.51,32.77
  Bottom 0.152: v16.38,26.29 19.66,26.29 v19.8,26.43
  other vias: 11.61,32.9
GDR
  Top 0.15: J3.2 12.03,10.85 12.03,11.03 11.81,11.24 11.81,14.73 11.28,15.26 R12.2
  Top 0.152: Q2.1 10.65,15.27 R12.2
GND  (via drill 0.15, 0.3, 0.35)
  Top 0.15: U$1.P$75 10.61,37.75 U$1.P$B7 10.61,39.18 U$8.1 | U$1.P$F23 14.21,37.15 U$1.P$78 | U$15.4 15.81,42.72 U$15.2 14.66,40.32 U$10.1 | U$21.2 18.14,39.66 U$18.1 | D1.2 v7.87,18.29 5.84,18.29 J2.SH4 J2.SH2 | 25.65,27.3 26.04,26.92 IC2.B1 | U$34.2 13.96,17.85 C1.2 13.52,18.75 15.13,20.36 15.13,21.29 14.98,21.45 U$29.2 | R12.1 10.96,14.42 v10.96,13.97 10.96,11.43 | 10.96,11.43 10.96,10.82 | 10.96,11.43 10.2,12.19 v10.03,12.19 | v7.87,12.45 6.96,12.45 6.84,12.56 | v12.95,13.46 13.08,13.34 EPD_C2.1 | v24.77,12.95 24.77,13.07 24.13,13.71 | R13.2 8.47,21.25 v8.51,21.21 | SW5.1 30.99,13.46 v30.1,13.46 | J2.SH1 J2.SH3
  Top 0.152: U$4.2 13.09,29.59 U$24.2 13.46,29.53 14.67,29.53 14.69,29.51 v15.22,29.51 | 2.39,36.19 2.07,36.19 1.99,36.11 | IC3.D2 3.21,36.05 2.97,36.05 2.83,36.19 2.39,36.19 | 1.99,36.11 1.41,35.52 C39.2 | IC1.C1 IC1.C2 IC1.C3 14.91,26.38 15.08,26.38 15.47,26 15.47,24.37 U$30.2 U$29.2 | IC1.C1 IC1.B1 | IC1.C1 13.99,26.33 13.95,26.33 13.65,26.03 13.35,26.03 U$28.1 12.07,26.42 v12.06,26.42 11.28,26.42 11.26,26.4 9.73,26.4 v9.38,26.05 | IC4.8 IC4.9 4.83,31.37 4.42,31.77 U$31.2 4.07,31.98 C4.1 2.65,32.87 v2.54,32.77 2.52,32.74 2.52,31.57 2.65,31.45 R9.2 2.27,29.72 v1.65,29.72 | EPD_C5.1 16.77,13.21 17.27,13.71 EPD_C6.1 EPD_C7.1 EPD_C8.1 EPD_C9.1 EPD_C10.1 EPD_C11.1 EPD_C12.1 24.13,13.71 | 10.96,10.82 J3.MP1 | EPD_C2.1 EPD_C1.1 14.1,12.29 15.03,11.36 15.03,10.85 J3.8 15.47,10.4 15.47,10.22 15.55,10.15 15.6,10.15 v15.88,9.87 | 8.95,42.09 8.95,39.01 9.3,38.66 9.3,38.27 9.48,38.09 9.66,38.09 U$1.P$75 U$1.P$74 | v30.1,13.46 | v24.64,7.87 24.14,7.87 J3.MP2 | C5.1 1.88,34.9 C39.2 | C39.2 1.76,34.06 C6.1 | 30.47,33.03 30.37,32.92 30.37,31.91 C11.1 30.28,31.75 31.06,30.97 33.55,30.97 33.81,30.7 C8.1 33.3,29.48 v33.15,29.34 | 30.47,33.03 30.53,33.08 31.48,33.08 31.56,33.16 31.56,34.66 31.2,35.01 31.2,35.14 SW4.1 | U$1.P$74 U$1.P$80 | U$1.P$74 U$1.P$81 | U$1.P$74 U$1.P$85 | 12.11,36.85 U$1.P$77 | U$1.P$74 12.11,36.85 | 12.11,36.85 U$1.P$76 | U$1.P$74 U$1.P$78 16,39.54 U$16.2 16.23,40.11 16.26,40.11 16.37,40.22 16.37,40.77 | 13.31,35.65 U$1.P$82 | U$1.P$74 13.31,35.65 | 13.31,35.65 U$1.P$86 | U$1.P$74 U$1.P$90 15.43,32.32 15.43,31.81 U$22.2 15.51,31.61 15.51,31.08 v15.46,31.04 | 12.11,34.45 U$1.P$89
  Top 0.152: U$1.P$74 12.11,34.45 | 12.11,34.45 U$1.P$88 | U$1.P$74 U$1.P$87 | U$1.P$74 U$1.P$84 U$1.P$83 | U$1.P$74 10.91,35.65 U$1.P$79 | 8.95,42.09 U$26.2 11.43,44.57 TP_BAT_GND.TP | 8.95,42.09 8.83,41.97 7.82,41.97 7.75,42.04 | TP_GND.TP 7.75,42.04 | 7.75,42.04 7.75,41.52 U$25.1 6.62,40.64 U$2.1 6.34,39.84 6.15,40.03 6.12,40.03 U$6.1 U$5.1 4.46,40.27 v4.45,40.26 | J1.5 J1.3 25.63,33.58 27.12,33.58 27.55,33.15 v29.84,33.15 29.97,33.03 30.47,33.03 | 15.81,42.72 15.81,42.64 16.37,42.09 16.37,40.77 | U$17.2 17.53,42.98 17.53,41.27 | 17.53,41.27 U$18.1 17.28,39.41 17.28,39.39 17.14,39.25 U$13.2 | 16.37,40.77 16.56,40.77 v16.82,41.02 | v17.78,41.4 17.65,41.27 17.53,41.27 | D2.1 6.84,12.56 6.34,13.06 R11.1 3.41,13.06 SJ1.1 | U$23.2 U$27.2 9.41,29.72 9.53,29.72 9.66,29.59 U$4.2 | v32.77,16 32.62,16 C10.1 30.99,14.33 30.99,13.46 | IC2.B3 25.65,25.15 v25.65,24.64 | U$36.2 19.75,9.72 J3.17 19.97,10.4 19.97,10.22 20.05,10.15 20.33,10.15 v20.57,9.91 | R4.1 2.39,36.19 | v2.03,35.94 1.99,35.98 1.99,36.11 | C7.1 27.58,26.54 26.82,27.3 25.65,27.3 25.42,27.07 v25.21,27.07 | C9.1 30.21,23.57 30.21,23.74 30.29,23.81 30.67,23.81 31.04,24.18 SW6.1 31.04,25.25 v31.11,25.33 | R14.1 8.31,23.59 v8.31,23.11 | C2.1 21.63,20.86 U1.4 23,20.86 U1.9 23.75,21.59 | 23.75,21.59 24.27,21.59 24.3,21.56 24.46,21.56 U1.6 25.89,21.32 v27.43,22.86 | U1.1 22.98,22.36 23.75,21.59 | U$4.2 10.75,29.12 v10.91,29.12
  Bottom 0.15: v10.03,12.19 8.13,12.19 v7.87,12.45 | v10.96,13.97 12.45,13.97 v12.95,13.46 | v8.51,21.21 7.92,20.62 7.92,20.57 | v25.21,27.07 25.21,26.86 25.02,26.67 25.02,25.27 v25.65,24.64 v27.43,22.86 30.61,22.86 31.11,23.37
  Bottom 0.152: v30.1,13.46 29.58,12.95 25.01,12.95 24.77,12.7 | v24.77,12.95 24.77,12.7 | 24.77,12.7 24.77,9.91 | 24.77,9.91 24.77,8 v24.64,7.87 | v16.82,41.02 17.4,41.02 v17.78,41.4 27.94,41.4 29.84,39.5 v29.84,33.15 | v2.54,32.77 2.54,35.43 v2.03,35.94 2.03,37.85 v4.45,40.26 | 7.92,20.57 7.92,18.34 v7.87,18.29 | v32.77,16 32.77,17.97 31.11,19.62 31.11,23.37 v31.11,25.33 32.87,27.08 32.91,27.08 33.15,27.31 v33.15,29.34 | v1.65,29.72 1.65,27.67 J2.SH1 | 9.27,22.86 9.27,21.97 v8.51,21.21 | 24.77,9.91 24.38,10.29 20.95,10.29 v20.57,9.91 15.91,9.91 v15.88,9.87 | v9.38,26.05 9.27,25.94 9.27,22.86 | v8.31,23.11 9.02,23.11 9.27,22.86 | v10.91,29.12 12.06,27.97 v12.06,26.42 | v15.46,31.04 15.22,30.79 v15.22,29.51
  pour Top: 24.22,40.51 24.16,40.49 17.75,40.49 17.69,40.51 17.65,40.55 17.63,40.61 17.63,46.84 -3.66,46.84 -3.66,-1.12 36.77,-1.12 37.95,0.06 37.95,46.84 24.28,46.84 24.28,40.61 24.26,40.55
  pour Bottom: 24.22,40.51 24.16,40.49 17.75,40.49 17.69,40.51 17.65,40.55 17.63,40.61 17.63,46.84 -3.66,46.84 -3.66,-1.12 36.77,-1.12 37.95,0.06 37.95,46.84 24.28,46.84 24.28,40.61 24.26,40.55
HAPTIC_EN  (via drill 0.15)
  Top 0.152: U$1.P$U1 8.48,34.02 8.48,33.76 8.26,33.53 v8.26,32.51 | v9.02,31.5 9.02,31.07 8.97,31.03 8.97,30.42 9.05,30.35 9.75,30.35 9.91,30.51 12.12,30.51 v12.23,30.62
  Bottom 0.15: v8.26,32.51 9.02,31.75 v9.02,31.5
  Bottom 0.152: IC2.A1 26.54,27.55 25.84,28.24 20.95,28.24 20.27,27.56 17.91,27.56 17.02,28.45 14.4,28.45 v12.23,30.62
  other vias: 26.54,26.54
IMU_INT1
  Top 0.152: IC4.5 6.35,30.23 6.96,30.83 6.96,34.48 6.91,34.52 6.91,35.23 7.92,36.24 8.02,36.24 8.48,35.77 U$1.P$N1
IMU_INT2  (via drill 0.15)
  Top 0.152: IC4.6 6.35,30.73 v6.6,30.99 | v7.49,32.37 7.49,34.15 7.47,34.17 7.47,34.47 v7.27,34.67
  Bottom 0.152: v7.49,32.37 7.49,31.88 v6.6,30.99 | U$1.P$P2 7.97,35.15 7.49,34.67 v7.27,34.67
  other vias: 9.36,35.15
LX1  (via drill 0.35)
  Top 0.152: IC1.B2 IC1.B3 14.97,26.91 15.01,26.91 15.19,27.09 15.19,27.13 v15.54,27.48 | v16.88,27.7 18.03,27.7 L1.1
  Bottom 0.152: v16.88,27.7 15.77,27.7 v15.54,27.48
LX2  (via drill 0.35)
  Top 0.152: IC1.D2 IC1.D3 14.97,26.11 14.97,25.97 15.19,25.75 15.19,25.3 v14.89,25 | L1.2 18.3,25.15 16.99,25.15 v16.84,25
  Bottom 0.152: v16.84,25 v16.83,25 v14.89,25
MOSI  (via drill 0.15)
  Top 0.152: J3.14 18.03,10.85 18.03,11.03 17.27,11.78 17.27,11.94 16.8,12.4 16.52,12.4 16.42,12.51 16.42,13.4 16.43,13.41 16.43,13.89 17.78,15.24 v17.78,18.8 | U$1.P$B13 12.38,38.67 12.45,38.67 12.63,38.85 12.63,38.99 13.08,39.44 13.4,39.44 v13.44,39.4 | v18.03,32.51 18.69,31.86 18.69,30.34 20.95,28.07 20.95,23.62 21.21,23.37 v21.21,22.73
  Bottom 0.152: v13.44,39.4 14.7,39.4 18.03,36.07 v18.03,32.51 | v21.21,22.73 21.21,22.23 v17.78,18.8
N$1
  Top 0.152: U$1.P$D2 9.3,37.59 8.26,37.59 7.62,38.23 U$11.2 6.96,38.68 U$6.2
N$2
  Top 0.152: U$5.2 4.45,39.09 4.45,38.23 U$11.1 5.49,37.2 7.52,37.2 7.59,37.28 8.5,37.28 8.63,37.15 U$1.P$F2
N$3
  Top 0.15: U$12.1 17.65,38.35 | U$1.P$H23 14.91,36.7 16.76,36.7 17.14,37.08
  Top 0.152: 17.65,38.35 U$13.1 17.14,37.08
N$4
  Top 0.15: U$19.1 9.61,39.16 U$1.P$B3
N$5  (via drill 0.3)
  Top 0.15: U$26.1 U$20.2 9.57,40.85 9.59,40.85 9.95,40.49 9.95,39.9 10.29,39.57 U$8.2 10.11,39.19 U$1.P$B5
  Top 0.152: v10.79,41.66 U$26.1 | U$1.P$E24 15.92,37.4 v15.94,37.38
  Bottom 0.152: v10.79,41.66 10.79,40.52 13.28,38.04 15.28,38.04 v15.94,37.38
N$6
  Top 0.152: IC1.E1 13.92,25.46 13.85,25.46 13.81,25.42 R6.1
N$7
  Top 0.152: U$18.2 15.06,37.7 14.91,37.7 U$1.P$D23
N$8
  Top 0.152: U$1.P$A23 15.46,39.5 15.46,41.21 U$15.3 15.81,40.57 U$16.1
N$9
  Top 0.152: U$1.P$B24 16.75,39.79 16.75,39.92 17.25,40.42 17.25,41.93 16.89,42.29 U$17.1 16.8,43.11 16.29,43.62 15.34,43.62 14.74,43.02 U$15.1
N$10
  Top 0.15: U$20.1 U$19.2
N$11
  Top 0.15: U$12.2 U$21.1 20.57,41.58 ANT1.1
N$12  (via drill 0.15)
  Top 0.152: v9.91,31.37 9.91,31.23 U$27.1
  Bottom 0.152: U$1.P$AC5 10.11,32.11 10.02,32.02 10.02,31.48 v9.91,31.37
  other vias: 10.11,32.9
N$13
  Top 0.15: J2.A12_B1 5.52,19.8 5.21,19.48 3.76,19.48 3.3,19.94 3.3,25.13 4.69,26.52 5.21,26.52 5.52,26.2 J2.A1_B12
N$14
  Top 0.152: IC1.D1 13.99,25.93 13.95,25.93 13.77,25.75 12.95,25.75 12.7,25.5 R5.1
N$15
  Top 0.152: IC4.1 3.96,29.34 R9.1
N$17
  Top 0.152: EPD_C2.2 13.25,11.4 J3.4
N$18
  Top 0.152: IC3.D1 4.55,35.11 4.55,35.14 3.26,36.43 R4.2
N$19
  Top 0.152: EPD_C1.2 13.75,11.22 J3.5
N$20
  Top 0.152: EPD_C7.2 20.12,11.38 20.17,11.38 20.53,11.03 20.53,10.85 J3.19
N$21
  Top 0.152: C7.2 IC2.A2
N$22
  Top 0.152: J3.18 20.03,10.85 20.03,11.03 19.95,11.1 19.04,11.1 17.78,12.36 EPD_C6.2
N$23
  Top 0.152: EPD_C8.2 19.53,12.99 19.53,12.53 21.25,10.8 J3.20
N$25
  Top 0.152: EPD_C12.2 23.25,12.08 J3.24
N$26
  Top 0.152: D4.1 4.57,10.26 D2.2 5.6,10.79 U$37.1
N$27
  Top 0.152: J3.22 22.25,12.3 EPD_C10.2
N$28
  Top 0.15: R14.2 6.06,24.21 J2.A5
N$29
  Top 0.15: R13.1 J2.B5 | J2.B5
N$30  (via drill 0.3)
  Top 0.15: L2.1 25.07,7.93 25.07,8.05 24.52,8.6 23.84,8.6 23.37,8.13 13.46,8.13 v11.94,9.65 | v10.16,9.65 10.03,9.53 9.31,9.53
  Top 0.152: D3.2 8.26,7.88 U$37.2 9.31,8.94 9.31,9.53 9.31,11.25 8.89,11.67 Q2.3
  Bottom 0.15: v11.94,9.65 v10.16,9.65
N$31
  Top 0.15: R10.1 R11.2
  Top 0.152: R11.2 3.66,13.61 SJ1.2
OUT+
  Top 0.152: IC2.A3 26.73,25.73 29,25.73 TP_OP.TP
OUT-
  Top 0.152: TP_ON.TP 24.77,25.54 IC2.C3
P0.13  (via drill 0.15, 0.2)
  Top 0.152: R1.1 34.34,29.48 34.42,29.56 34.42,30.99 34.16,31.25 31.96,31.25 31.73,31.48 31.73,31.82 31.51,32.03 31.04,32.03 | 31.04,32.03 C11.2 30.88,31.62 v31.24,31.62 | SW4.2 31.04,32.03 | U$1.P$AD8 10.86,30.93 12.04,30.93 12.08,30.97 12.58,30.97 v13.12,31.5
  Bottom 0.152: v31.24,31.62 28.17,31.62 27.52,30.98 27.52,30.22 27.31,30.02 26.39,30.02 26.12,30.29 25.76,30.29 25.06,30.99 24.42,30.99 23.72,30.29 20.68,30.29 19.64,31.34 19.64,31.47 19.48,31.62 14.32,31.62 14.26,31.68 13.3,31.68 v13.12,31.5
P0.14  (via drill 0.15, 0.3)
  Top 0.152: 31.73,14.5 31.73,11.36 SW5.2 | C10.2 31.66,14.5 31.73,14.5 | v33.58,27.18 33.25,27.5 R2.1 32.77,27.45 v32.77,27.43 | 31.73,14.5 v32.17,14.94 | v19.02,32.2 19.02,31.92 19.15,31.79 v19.15,30.64
  Bottom 0.15: U$1.P$AC9 11.62,32.38 16.03,32.38 16.51,31.9
  Bottom 0.152: v32.17,14.94 33.44,14.94 34.67,16.17 34.67,18.92 33.35,20.25 32.04,20.25 31.58,20.71 31.58,25.27 33.49,27.18 v33.58,27.18 | v32.77,27.43 30.86,27.43 29.08,29.21 21.8,29.21 20.99,30.01 20.56,30.01 19.94,30.64 v19.15,30.64 | 16.51,31.9 18.72,31.9 v19.02,32.2
  other vias: 11.11,32.9
P1.01/1.6C
  Top 0.152: R_PWR_EPD.1 Q1.1
P1.02  (via drill 0.15)
  Top 0.152: R3.1 34.29,26.67 v34.1,26.48 33.37,25.75 31.94,25.75 31.71,25.53 31.71,22.39 31.04,21.72 SW6.2 30.67,21.95 30.67,22.16 30.29,22.16 30.21,22.24 30.21,22.66 C9.2 | v33.27,30.1 26.8,30.1 27.07,30.37 v27.17,30.37 | U$1.P$W24 15.49,34.03 17.77,34.03 17.9,34.16 v18.52,34.16
  Bottom 0.152: v33.27,30.1 34.1,29.27 v34.1,26.48 | v18.52,34.16 18.52,34.05 19.91,32.65 19.91,31.45 20.8,30.57 23.6,30.57 24.3,31.27 25.18,31.27 25.88,30.57 26.57,30.57 26.77,30.37 v27.17,30.37
PMIC_INT  (via drill 0.2, 0.3)
  Top 0.15: v5.22,33.54 4.92,33.54 IC3.A1
  Bottom 0.15: v5.22,33.54 5.46,33.78 7.39,33.78 8.25,34.64 U$1.P$T2
  other vias: 9.36,34.65
PREVGH  (via drill 0.3)
  Top 0.15: D3.1 8.35,3.81 10.25,3.81 v10.25,7.75 | v21.72,9.65 21.72,10.59 J3.21
  Top 0.152: EPD_C9.2 21.75,11.79 J3.21
  Bottom 0.15: v10.25,7.75 21.59,7.75 21.72,7.87 v21.72,9.65
PREVGL  (via drill 0.3)
  Top 0.15: D4.2 5.69,4.83 v9.4,4.83 | v20.95,9.02 21.84,9.02 22.75,9.92 J3.23
  Top 0.152: EPD_C11.2 22.75,12.6 J3.23
  Bottom 0.15: v9.4,4.83 9.4,7.62 10.79,9.02 v20.95,9.02
RESE  (via drill 0.3)
  Top 0.15: R10.2 7.59,14.63 Q2.2 8.59,15.27 10.03,13.83 v10.03,13.59 | J3.3 12.75,11.13 12.24,11.64 v12.24,11.68
  Bottom 0.15: v12.24,11.68 10.33,13.59 v10.03,13.59
RESET  (via drill 0.15, 0.3)
  Top 0.152: TP_RESET.TP 23.75,41.53 23.75,36.82 23.32,36.39 J1.6 22.91,35.88 22.04,36.75 18.59,36.75 17.25,35.41 16.88,35.41 v15.94,34.46
  Bottom 0.152: U$1.P$AC13 12.36,33.15 12.76,33.15 13.38,33.77 13.38,34.07 13.69,34.38 13.8,34.38 13.94,34.52 15.88,34.52 v15.94,34.46
  other vias: 12.11,32.9
SASSS
  Top 0.152: U$1.P$C1 7.59,39.16 7.59,39.18 7.13,39.64 U$2.2
SCK  (via drill 0.15)
  Top 0.152: J3.13 17.53,10.85 17.53,11.03 17.45,11.1 17.43,11.1 16.14,12.39 16.14,13.52 16.15,13.53 16.15,15.9 v16.76,16.51 | U$1.P$A12 12.96,40.01 v13.08,40.01 | v22.1,27.3 22.1,23.75 v21.97,23.62 | v24.89,27.81 25.26,28.18 25.26,29.68 23.7,31.24 v23.36,31.24
  Bottom 0.152: v13.08,40.01 14.86,40.01 19.91,34.95 19.91,34.63 20.97,33.58 22.04,33.58 22.92,32.7 22.92,31.95 23.36,31.5 v23.36,31.24 | v24.89,27.81 24.77,27.69 22.48,27.69 v22.1,27.3 | v16.76,16.51 21.97,21.72 v21.97,23.62
SCL  (via drill 0.15, 0.3)
  Top 0.15: 5.38,34.92 5.38,36.15 6.16,36.92 7.24,36.92 | 9.14,25.53 9.14,25.02 TP_SCL.TP
  Top 0.152: IC3.B1 4.74,34.31 4.77,34.31 4.91,34.46 | 4.91,34.46 5.38,34.92 | R8.2 12.73,24.83 R5.2 12.03,25.53 v11.81,25.53 9.14,25.53 9.04,25.53 v7.06,27.51 | 4.91,34.46 5.71,33.66 5.71,32.38 v5.21,31.88 | IC4.12 3.99,30.23 v3.35,30.86 | 7.24,36.92 7.63,36.92 v8.35,36.92 | v26.04,22.61 26.04,22.48 25.37,21.82 U1.7 | IC2.C1 25.43,26.64 25.04,26.64 24.5,27.18 v24.38,27.18
  Bottom 0.15: U$1.P$M2 8.85,35.65 8.41,36.08 8.41,36.86 v8.35,36.92
  Bottom 0.152: 4.19,30.86 v5.21,31.88 | 4.19,30.86 v3.35,30.86 | 4.19,30.86 4.7,30.86 6.39,29.17 6.39,28.39 7.06,27.72 v7.06,27.51 | v26.04,22.61 24.64,24 24.64,24.51 | 24.64,24.51 24.64,26.92 v24.38,27.18 | v11.81,25.53 12.32,25.02 13.21,25.02 13.72,24.51 24.64,24.51
  other vias: 9.36,35.65
SDA  (via drill 0.15, 0.3, 0.35)
  Top 0.15: U$1.P$L1 8.75,35.9 8.14,36.51 6.67,36.51 v5.84,35.69
  Top 0.152: R6.2 v13.21,24.26 R7.2 | IC3.C1 4.95,34.92 4.95,36.32 v4.45,36.32 | v5.84,35.69 6.22,35.31 v6.22,32 | IC4.2 4.91,29.63 4.91,28.91 5.16,28.65 5.51,28.65 6.32,29.46 6.6,29.46 v6.67,29.53 | v12.19,24.13 12.19,22.02 TP_SDA.TP | IC2.B2 26.29,25.78 26.29,23.47 25.54,22.72 | U1.8 25.14,22.32 25.54,22.72 | v24.77,22.99 25.03,22.72 25.54,22.72
  Bottom 0.152: 13.08,24.13 v13.21,24.26 | 13.08,24.13 v12.19,24.13 9.24,27.08 9.12,27.08 7.31,28.89 7.3,28.89 v6.67,29.53 6.22,29.97 v6.22,32 | v4.45,36.32 5.21,36.32 v5.84,35.69 | v24.77,22.99 23.62,24.13 13.08,24.13
SWDCLK
  Top 0.152: J1.4 22.91,34.61 22.04,33.75 20.32,33.75 | U$1.P$AA24 15.71,33.75 20.32,33.75 | 20.32,33.75 18.99,35.08 TP_SWDCLK.TP
SWDIO
  Top 0.152: 22.4,30.94 22.92,31.45 22.92,32.94 J1.2 | TP_SWDIO.TP 22.4,30.94 | 22.4,30.94 22.04,30.57 20.8,30.57 19.38,31.99 19.38,32.35 18.61,33.12 16.36,33.12 16.14,32.9 U$1.P$AC24
SWO  (via drill 0.15, 0.3)
  Top 0.152: TP_SWO.TP 16.24,29.98 14.74,29.98 v14.46,30.26 | U$1.P$AD22 14.11,32.15 v14.11,31.33
  Bottom 0.152: v14.11,31.33 14.11,31.14 14.46,30.78 v14.46,30.26
VBAT  (via drill 0.15)
  Top 0.152: C5.2 2.64,34.84 2.71,34.84 2.93,34.62 v3.81,34.62 IC3.C2 | 22.48,21.36 21.68,21.36 C2.2 21.53,21.21 TP_VBAT.TP 19.59,21.6 19.59,23.9 19.64,23.95 19.64,25.91 19.57,25.99 17.86,25.99 15.2,28.65 7.44,28.65 7.11,28.32 3.43,28.32 2.71,29.04 1.69,29.04 1.2,29.53 1.2,29.91 1.65,30.36 v1.65,31.37 | 22.48,21.36 U1.3 | U1.2 22.75,21.62 22.48,21.36
  Bottom 0.152: v3.81,34.62 3.81,33.27 2.41,31.88 2.16,31.88 v1.65,31.37
VBUS  (via drill 0.15, 0.3)
  Top 0.15: D1.5 11.14,18.81 7.64,18.81 7.64,19.24 6.65,20.23 6.4,20.23 J2.A9_B4 5.34,20.6 5.21,20.73 4.16,20.73 3.68,21.21 3.68,24.89 4.06,25.27 5.21,25.27 5.34,25.4 J2.A4_B9 6.4,25.77 6.65,25.77 6.72,25.85 6.72,26.03 v7.24,26.54 | v6.83,28.73 7.12,28.73 7.83,29.43 7.83,30.03 8.26,30.45 U$23.1
  Top 0.152: C4.2 3.57,33.82 IC3.A2 4.32,33.74 v4.32,32.64 | U$1.P$AD2 9.09,32.13 8.63,32.13 v8.26,31.75 U$23.1 | D1.5 C1.1 12.96,18.1 U$34.1
  Bottom 0.15: v7.24,26.54 7.49,26.8 7.49,28.19 7.24,28.45 7.11,28.45 v6.83,28.73
  Bottom 0.152: v4.32,32.64 6.5,32.64 6.81,32.94 7.42,32.94 7.9,32.46 7.9,32.34 8.26,31.99 v8.26,31.75
VREG
  Top 0.152: IC3.B2 2.6,34.22 C39.1 2.31,34.32 C6.2 0.92,32.39 0.92,29.41 2.29,28.04 8.49,28.04 8.74,28.29 9.27,28.29 10.14,27.42 10.79,27.42 | IC1.A3 IC1.A2 IC1.A1 13.87,27.42 U$28.2 10.79,27.42 | TP_VREG.TP 10.79,27.42